# EAGLE board Triac-Board_MAX (EAGLE 7.2.0)
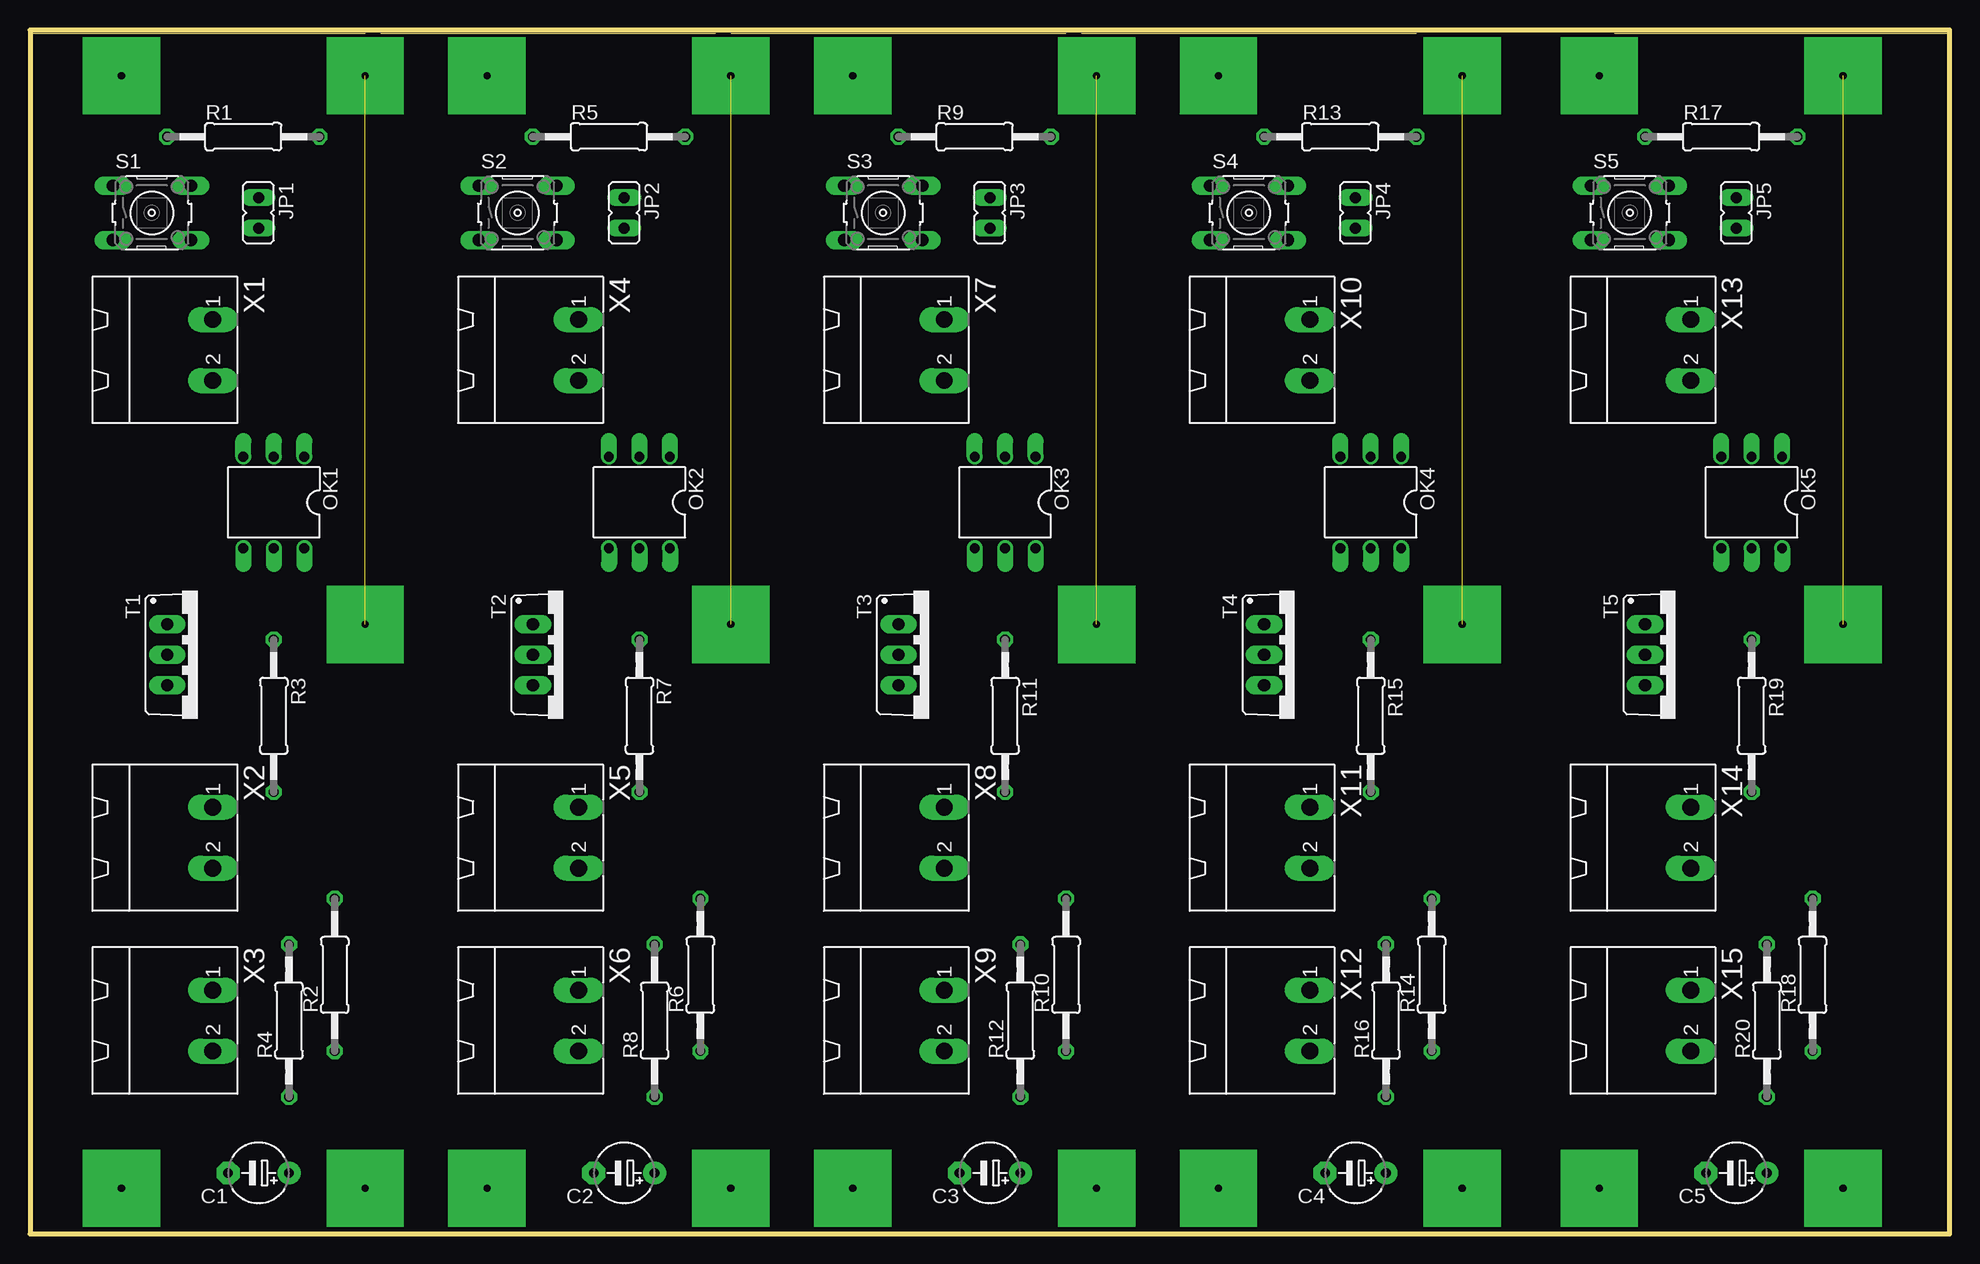
[diagram p0: board, top side]
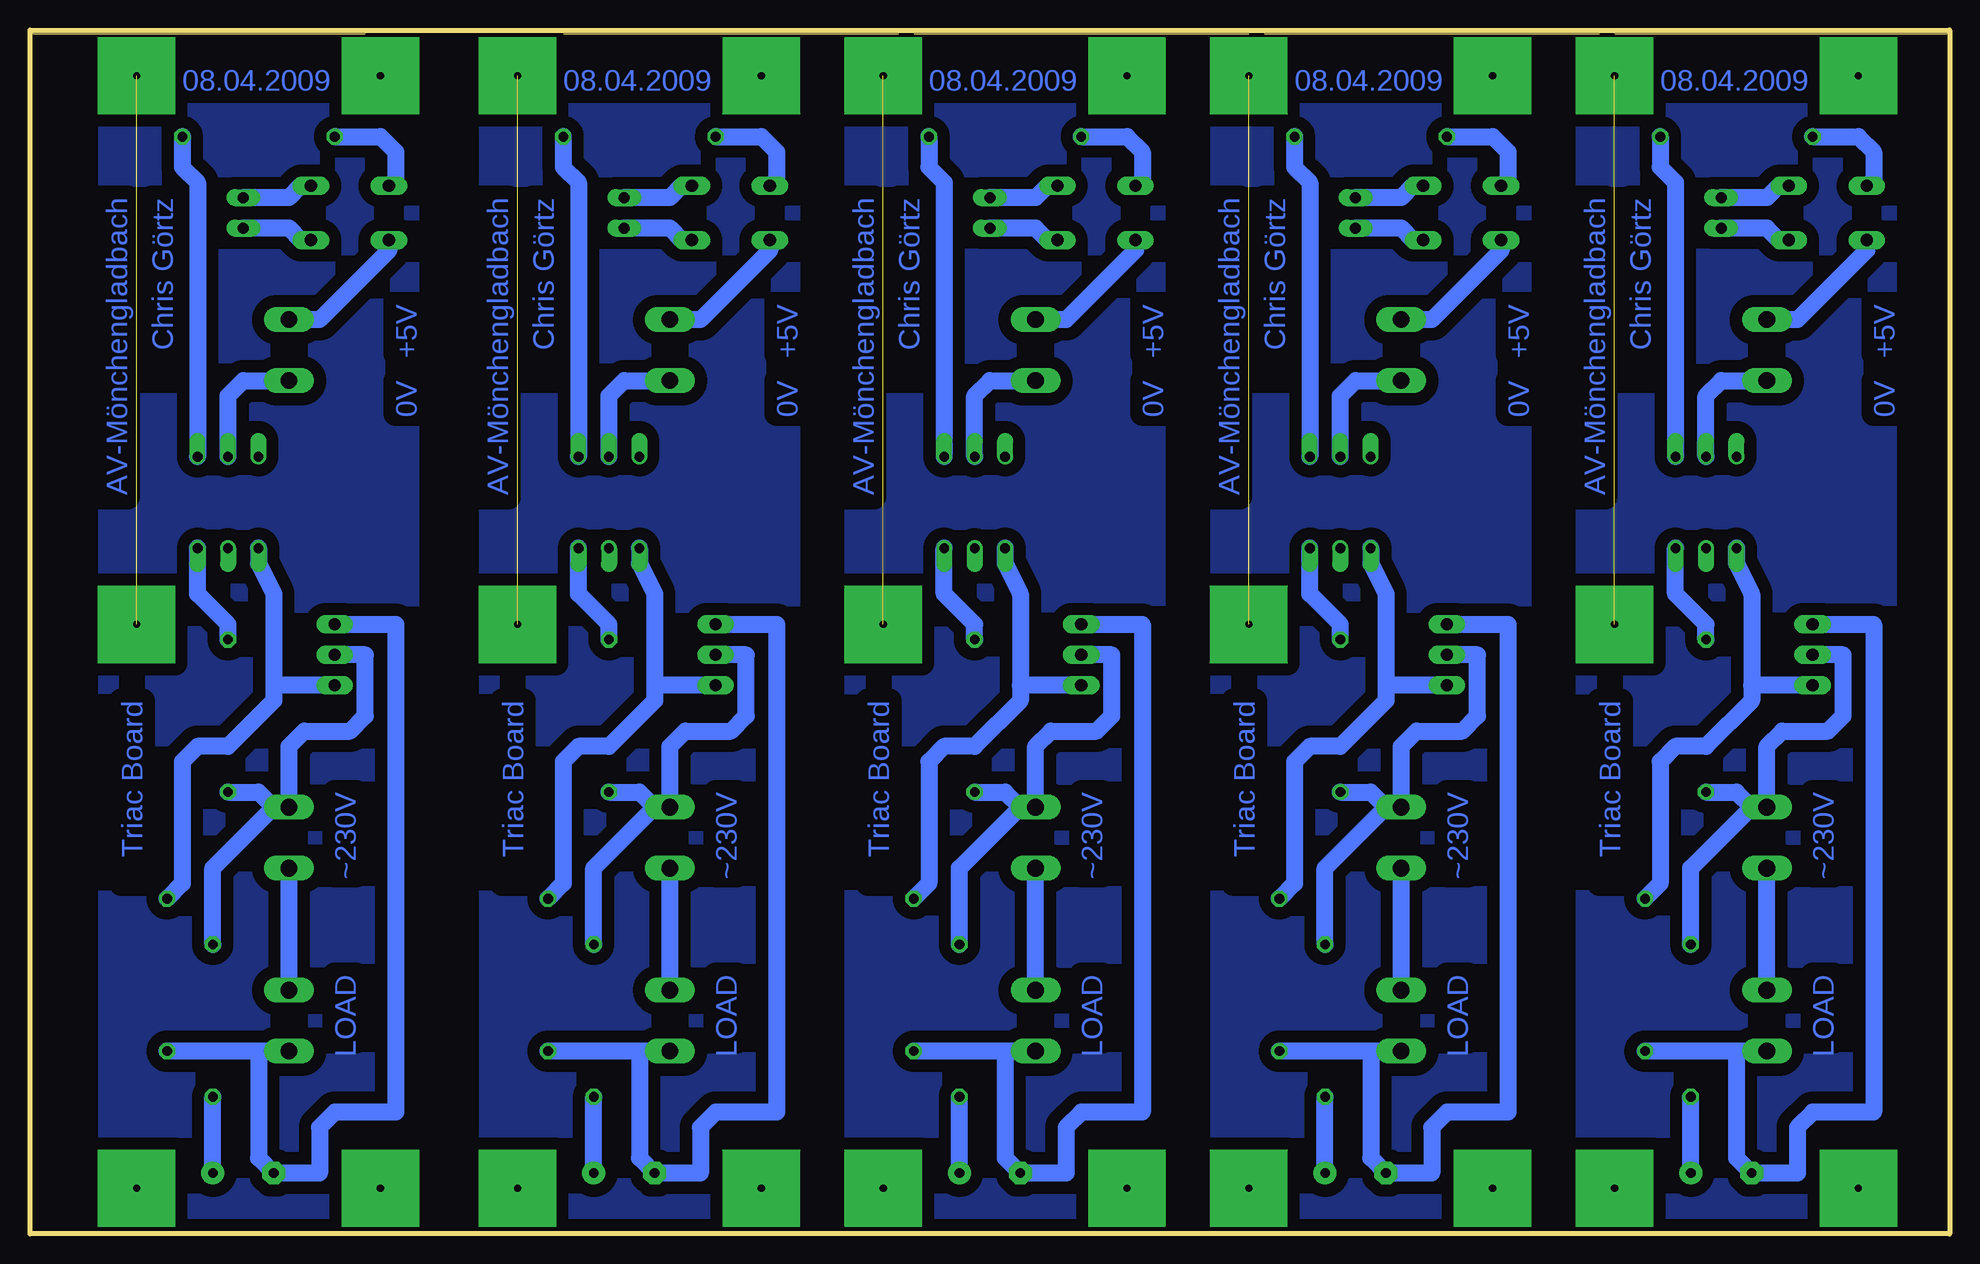
[diagram p1: board, bottom side, seen from below]

Size 160.02 x 100.33 mm. Coordinates in mm from the lower left corner, seen from the top.
Outline: 0,0 160.02,0 160.02,100.33 0,100.33 0,0
Outline: 0,0 27.92,0
Outline: 27.92,100 0,100 0,0
Outline: 29.21,0 57.13,0
Outline: 57.13,100 29.21,100
Outline: 69.85,0 97.77,0
Outline: 86.34,100 58.42,100
Outline: 99.06,0 115.55,0
Outline: 115.55,100 87.63,100
Outline: 132.08,0 160,0 160,100 132.08,100
Copper layers (1*16): Top 0.035mm / dielectric 1.5mm / Bottom 0.035mm
Design rules "default": minimum track width 10mil, minimum drill 24mil, track to track 8mil, track to pad 8mil, pad to pad 8mil, via to via 8mil, smd to smd 8mil, copper to edge 40mil, drill to drill 8mil, minimum pad ring 10mil, minimum via ring 8mil, stop-mask expansion 4mil, vias tented up to drill 0mil, thermal gap 10mil

## Footprints (pad centres in the part's own frame; a part is rotated, then mirrored left to right if it is on the bottom)
E5-5 = drill 0.813 pad 1.905: + -2.54,0 | drill 0.813 pad 1.905 octagon: - 2.54,0
JP1 = drill 0.914 long: 1 0,-1.27; 2 0,1.27
DIL06 = drill 0.813 offset: 1 -2.54,-3.81; 2 0,-3.81; 3 2.54,-3.81; 4 2.54,3.81; 5 0,3.81; 6 -2.54,3.81
0207/12 = drill 0.813 octagon: 1 -6.35,0; 2 6.35,0
B3F-10XX = drill 1.016 long: 1 -3.251,2.261; 2 3.251,2.261; 3 -3.251,-2.261; 4 3.251,-2.261
TO220BV = drill 1.016 long: G 2.54,-2.54; T1 -2.54,-2.54; T2 0,-2.54
MSTBA2 = drill 1.397 long: 1 -2.54,5.08; 2 2.54,5.08

## Placement (x,y rotation side)
C1  10nF/400v  [E5-5]  19.05,5.08 180 top
C2  10nF/400v  [E5-5]  49.53,5.08 180 top
C3  10nF/400v  [E5-5]  80.01,5.08 180 top
C4  10nF/400v  [E5-5]  110.49,5.08 180 top
C5  10nF/400v  [E5-5]  142.24,5.08 180 top
JP1  [JP1]  19.05,85.09 180 top
JP2  [JP1]  49.53,85.09 180 top
JP3  [JP1]  80.01,85.09 180 top
JP4  [JP1]  110.49,85.09 180 top
JP5  [JP1]  142.24,85.09 180 top
OK1  IL410  [DIL06]  20.32,60.96 180 top
OK2  IL410  [DIL06]  50.8,60.96 180 top
OK3  IL410  [DIL06]  81.28,60.96 180 top
OK4  IL410  [DIL06]  111.76,60.96 180 top
OK5  IL410  [DIL06]  143.51,60.96 180 top
R1  330  [0207/12]  17.78,91.44 0 top
R2  330  [0207/12]  25.4,21.59 90 top
R3  330  [0207/12]  20.32,43.18 270 top
R4  39  [0207/12]  21.59,17.78 90 top
R5  330  [0207/12]  48.26,91.44 0 top
R6  330  [0207/12]  55.88,21.59 90 top
R7  330  [0207/12]  50.8,43.18 270 top
R8  39  [0207/12]  52.07,17.78 90 top
R9  330  [0207/12]  78.74,91.44 0 top
R10  330  [0207/12]  86.36,21.59 90 top
R11  330  [0207/12]  81.28,43.18 270 top
R12  39  [0207/12]  82.55,17.78 90 top
R13  330  [0207/12]  109.22,91.44 0 top
R14  330  [0207/12]  116.84,21.59 90 top
R15  330  [0207/12]  111.76,43.18 270 top
R16  39  [0207/12]  113.03,17.78 90 top
R17  330  [0207/12]  140.97,91.44 0 top
R18  330  [0207/12]  148.59,21.59 90 top
R19  330  [0207/12]  143.51,43.18 270 top
R20  39  [0207/12]  144.78,17.78 90 top
S1  [B3F-10XX]  10.16,85.09 0 top
S2  [B3F-10XX]  40.64,85.09 0 top
S3  [B3F-10XX]  71.12,85.09 0 top
S4  [B3F-10XX]  101.6,85.09 0 top
S5  [B3F-10XX]  133.35,85.09 0 top
T1  BT138-V  [TO220BV]  13.97,48.26 270 top
T2  BT138-V  [TO220BV]  44.45,48.26 270 top
T3  BT138-V  [TO220BV]  74.93,48.26 270 top
T4  BT138-V  [TO220BV]  105.41,48.26 270 top
T5  BT138-V  [TO220BV]  137.16,48.26 270 top
X1  MSTBA2  [MSTBA2]  10.16,73.66 270 top
X2  MSTBA2  [MSTBA2]  10.16,33.02 270 top
X3  MSTBA2  [MSTBA2]  10.16,17.78 270 top
X4  MSTBA2  [MSTBA2]  40.64,73.66 270 top
X5  MSTBA2  [MSTBA2]  40.64,33.02 270 top
X6  MSTBA2  [MSTBA2]  40.64,17.78 270 top
X7  MSTBA2  [MSTBA2]  71.12,73.66 270 top
X8  MSTBA2  [MSTBA2]  71.12,33.02 270 top
X9  MSTBA2  [MSTBA2]  71.12,17.78 270 top
X10  MSTBA2  [MSTBA2]  101.6,73.66 270 top
X11  MSTBA2  [MSTBA2]  101.6,33.02 270 top
X12  MSTBA2  [MSTBA2]  101.6,17.78 270 top
X13  MSTBA2  [MSTBA2]  133.35,73.66 270 top
X14  MSTBA2  [MSTBA2]  133.35,33.02 270 top
X15  MSTBA2  [MSTBA2]  133.35,17.78 270 top

## Library data of the parts
C1-C5 R1-R20 = resistor
JP1-JP5 = jumper
OK1-OK5 = optocoupler; MF: VISHAY/TELEFUNKEN; MPN: IL410; OC_FARNELL: 1045434; OC_NEWARK: 58K1715
S1-S5 = switch-omron; MPN: B3F-1000; OC_FARNELL: 176432; OC_NEWARK: 36M3542
T1-T5 = triac
X1-X15 = con-phoenix-508; MF: FARNELL; MPN: 1757242; OC_FARNELL: 3705171; OC_NEWARK: 71C4161

## Nets
GND: OK1.2 X1.2
GND1: OK2.2 X4.2
GND2: OK3.2 X7.2
GND3: OK4.2 X10.2
GND4: OK5.2 X13.2
N$1: OK1.1 R1.2
N$2: R1.1 S1.1
N$4: OK1.6 R3.1
N$5: JP1.1 S1.2
N$6: JP1.2 S1.4
N$7: OK1.4 R2.2 T1.G
N$8: C1.+ R4.1
N$9: C1.- R2.1 T1.T1 X3.2
N$14: OK2.1 R5.2
N$15: R5.1 S2.1
N$16: JP2.1 S2.2
N$17: JP2.2 S2.4
N$18: OK2.6 R7.1
N$19: OK2.4 R6.2 T2.G
N$20: C2.+ R8.1
N$21: C2.- R6.1 T2.T1 X6.2
N$27: OK3.1 R9.2
N$28: R9.1 S3.1
N$29: JP3.1 S3.2
N$30: JP3.2 S3.4
N$31: OK3.6 R11.1
N$32: OK3.4 R10.2 T3.G
N$33: C3.+ R12.1
N$34: C3.- R10.1 T3.T1 X9.2
N$40: OK4.1 R13.2
N$41: R13.1 S4.1
N$42: JP4.1 S4.2
N$43: JP4.2 S4.4
N$44: OK4.6 R15.1
N$45: OK4.4 R14.2 T4.G
N$46: C4.+ R16.1
N$47: C4.- R14.1 T4.T1 X12.2
N$53: OK5.1 R17.2
N$54: R17.1 S5.1
N$55: JP5.1 S5.2
N$56: JP5.2 S5.4
N$57: OK5.6 R19.1
N$58: OK5.4 R18.2 T5.G
N$59: C5.+ R20.1
N$60: C5.- R18.1 T5.T1 X15.2
V+: R3.2 R4.2 T1.T2 X2.1
V+1: R7.2 R8.2 T2.T2 X5.1
V+2: R11.2 R12.2 T3.T2 X8.1
V+3: R15.2 R16.2 T4.T2 X11.1
V+4: R19.2 R20.2 T5.T2 X14.1
V-: X2.2 X3.1
V-1: X5.2 X6.1
V-2: X8.2 X9.1
V-3: X11.2 X12.1
V-4: X14.2 X15.1
VCC: S1.3 X1.1
VCC1: S2.3 X4.1
VCC2: S3.3 X7.1
VCC3: S4.3 X10.1
VCC4: S5.3 X13.1

## Tracks (layer width: path | path; a pad name or v marks a point on that pad's centre or on a via)
GND
  Bottom 1.422: OK1.2 20.32,69.85 19.05,71.12 X1.2
GND1
  Bottom 1.422: OK2.2 50.8,69.85 49.53,71.12 X4.2
GND2
  Bottom 1.422: OK3.2 81.28,69.85 80.01,71.12 X7.2
GND3
  Bottom 1.422: OK4.2 111.76,69.85 110.49,71.12 X10.2
GND4
  Bottom 1.422: OK5.2 143.51,69.85 142.24,71.12 X13.2
N$1
  Bottom 1.422: R1.2 24.13,88.9 22.86,87.63 OK1.1
N$2
  Bottom 1.422: R1.1 7.62,91.44 6.35,90.17 6.35,87.91 S1.1
N$3  (via drill 0.6 pad 6.45)
  other vias: 7.62,96.52
N$4
  Bottom 1.422: R3.1 20.32,50.8 22.86,53.34 OK1.6
N$5
  Bottom 1.422: S1.2 14.25,87.35 15.24,86.36 JP1.1
N$6
  Bottom 1.422: S1.4 14.25,82.83 15.24,83.82 JP1.2
N$7
  Bottom 1.422: T1.G 16.51,45.72 | OK1.4 17.78,55.88 16.51,53.34 16.51,45.72 | 16.51,45.72 16.51,44.45 20.32,40.64 22.86,40.64 24.13,39.37 24.13,29.21 R2.2
N$8
  Bottom 1.422: C1.+ R4.1
N$9
  Bottom 1.422: T1.T1 6.35,50.8 6.35,10.16 11.43,10.16 12.7,8.89 12.7,5.08 C1.- 17.78,6.35 17.78,15.24 | 17.78,15.24 R2.1 | X3.2 17.78,15.24
N$10  (via drill 0.6 pad 6.45)  (1 unrouted)
  other vias: 27.94,96.52 27.94,50.8
N$11  (via drill 0.6 pad 6.45)
  other vias: 7.62,3.81
N$12  (via drill 0.6 pad 6.45)
  other vias: 27.94,3.81
N$13
  pour Bottom (isolate 1.016): 5.08,99.06 30.48,99.06 30.48,1.27 5.08,1.27
N$14
  Bottom 1.422: R5.2 54.61,88.9 53.34,87.63 OK2.1
N$15
  Bottom 1.422: R5.1 38.1,91.44 36.83,90.17 36.83,87.91 S2.1
N$16
  Bottom 1.422: S2.2 44.73,87.35 45.72,86.36 JP2.1
N$17
  Bottom 1.422: S2.4 44.73,82.83 45.72,83.82 JP2.2
N$18
  Bottom 1.422: R7.1 50.8,50.8 53.34,53.34 OK2.6
N$19
  Bottom 1.422: T2.G 46.99,45.72 | OK2.4 48.26,55.88 46.99,53.34 46.99,45.72 | 46.99,45.72 46.99,44.45 50.8,40.64 53.34,40.64 54.61,39.37 54.61,29.21 R6.2
N$20
  Bottom 1.422: C2.+ R8.1
N$21
  Bottom 1.422: T2.T1 36.83,50.8 36.83,10.16 41.91,10.16 43.18,8.89 43.18,5.08 C2.- 48.26,6.35 48.26,15.24 | 48.26,15.24 R6.1 | X6.2 48.26,15.24
N$22  (via drill 0.6 pad 6.45)
  other vias: 38.1,96.52
N$23  (via drill 0.6 pad 6.45)  (1 unrouted)
  other vias: 58.42,96.52 58.42,50.8
N$24  (via drill 0.6 pad 6.45)
  other vias: 38.1,3.81
N$25  (via drill 0.6 pad 6.45)
  other vias: 58.42,3.81
N$26
  pour Bottom (isolate 1.016): 35.56,99.06 60.96,99.06 60.96,1.27 35.56,1.27
N$27
  Bottom 1.422: R9.2 85.09,88.9 83.82,87.63 OK3.1
N$28
  Bottom 1.422: R9.1 68.58,91.44 67.31,90.17 67.31,87.91 S3.1
N$29
  Bottom 1.422: S3.2 75.21,87.35 76.2,86.36 JP3.1
N$30
  Bottom 1.422: S3.4 75.21,82.83 76.2,83.82 JP3.2
N$31
  Bottom 1.422: R11.1 81.28,50.8 83.82,53.34 OK3.6
N$32
  Bottom 1.422: T3.G 77.47,45.72 | OK3.4 78.74,55.88 77.47,53.34 77.47,45.72 | 77.47,45.72 77.47,44.45 81.28,40.64 83.82,40.64 85.09,39.37 85.09,29.21 R10.2
N$33
  Bottom 1.422: C3.+ R12.1
N$34
  Bottom 1.422: T3.T1 67.31,50.8 67.31,10.16 72.39,10.16 73.66,8.89 73.66,5.08 C3.- 78.74,6.35 78.74,15.24 | 78.74,15.24 R10.1 | X9.2 78.74,15.24
N$35  (via drill 0.6 pad 6.45)
  other vias: 68.58,96.52
N$36  (via drill 0.6 pad 6.45)  (1 unrouted)
  other vias: 88.9,96.52 88.9,50.8
N$37  (via drill 0.6 pad 6.45)
  other vias: 68.58,3.81
N$38  (via drill 0.6 pad 6.45)
  other vias: 88.9,3.81
N$39
  pour Bottom (isolate 1.016): 66.04,99.06 91.44,99.06 91.44,1.27 66.04,1.27
N$40
  Bottom 1.422: R13.2 115.57,88.9 114.3,87.63 OK4.1
N$41
  Bottom 1.422: R13.1 99.06,91.44 97.79,90.17 97.79,87.91 S4.1
N$42
  Bottom 1.422: S4.2 105.69,87.35 106.68,86.36 JP4.1
N$43
  Bottom 1.422: S4.4 105.69,82.83 106.68,83.82 JP4.2
N$44
  Bottom 1.422: R15.1 111.76,50.8 114.3,53.34 OK4.6
N$45
  Bottom 1.422: T4.G 107.95,45.72 | OK4.4 109.22,55.88 107.95,53.34 107.95,45.72 | 107.95,45.72 107.95,44.45 111.76,40.64 114.3,40.64 115.57,39.37 115.57,29.21 R14.2
N$46
  Bottom 1.422: C4.+ R16.1
N$47
  Bottom 1.422: T4.T1 97.79,50.8 97.79,10.16 102.87,10.16 104.14,8.89 104.14,5.08 C4.- 109.22,6.35 109.22,15.24 | 109.22,15.24 R14.1 | X12.2 109.22,15.24
N$48  (via drill 0.6 pad 6.45)
  other vias: 99.06,96.52
N$49  (via drill 0.6 pad 6.45)  (1 unrouted)
  other vias: 119.38,96.52 119.38,50.8
N$50  (via drill 0.6 pad 6.45)
  other vias: 99.06,3.81
N$51  (via drill 0.6 pad 6.45)
  other vias: 119.38,3.81
N$52
  pour Bottom (isolate 1.016): 96.52,99.06 121.92,99.06 121.92,1.27 96.52,1.27
N$53
  Bottom 1.422: R17.2 147.32,88.9 146.05,87.63 OK5.1
N$54
  Bottom 1.422: R17.1 130.81,91.44 129.54,90.17 129.54,87.91 S5.1
N$55
  Bottom 1.422: S5.2 137.44,87.35 138.43,86.36 JP5.1
N$56
  Bottom 1.422: S5.4 137.44,82.83 138.43,83.82 JP5.2
N$57
  Bottom 1.422: R19.1 143.51,50.8 146.05,53.34 OK5.6
N$58
  Bottom 1.422: T5.G 139.7,45.72 | OK5.4 140.97,55.88 139.7,53.34 139.7,45.72 | 139.7,45.72 139.7,44.45 143.51,40.64 146.05,40.64 147.32,39.37 147.32,29.21 R18.2
N$59
  Bottom 1.422: C5.+ R20.1
N$60
  Bottom 1.422: T5.T1 129.54,50.8 129.54,10.16 134.62,10.16 135.89,8.89 135.89,5.08 C5.- 140.97,6.35 140.97,15.24 | 140.97,15.24 R18.1 | X15.2 140.97,15.24
N$61  (via drill 0.6 pad 6.45)
  other vias: 130.81,96.52
N$62  (via drill 0.6 pad 6.45)  (1 unrouted)
  other vias: 151.13,96.52 151.13,50.8
N$63  (via drill 0.6 pad 6.45)
  other vias: 130.81,3.81
N$64  (via drill 0.6 pad 6.45)
  other vias: 151.13,3.81
N$65
  pour Bottom (isolate 1.016): 128.27,99.06 153.67,99.06 153.67,1.27 128.27,1.27
V+
  Bottom 1.422: T1.T2 8.89,48.26 8.89,43.18 10.16,41.91 13.97,41.91 15.24,40.64 X2.1 16.51,35.56 | R4.2 21.59,30.48 16.51,35.56 | R3.2 17.78,36.83 16.51,35.56
V+1
  Bottom 1.422: T2.T2 39.37,48.26 39.37,43.18 40.64,41.91 44.45,41.91 45.72,40.64 X5.1 46.99,35.56 | R8.2 52.07,30.48 46.99,35.56 | R7.2 48.26,36.83 46.99,35.56
V+2
  Bottom 1.422: T3.T2 69.85,48.26 69.85,43.18 71.12,41.91 74.93,41.91 76.2,40.64 X8.1 77.47,35.56 | R12.2 82.55,30.48 77.47,35.56 | R11.2 78.74,36.83 77.47,35.56
V+3
  Bottom 1.422: T4.T2 100.33,48.26 100.33,43.18 101.6,41.91 105.41,41.91 106.68,40.64 X11.1 107.95,35.56 | R16.2 113.03,30.48 107.95,35.56 | R15.2 109.22,36.83 107.95,35.56
V+4
  Bottom 1.422: T5.T2 132.08,48.26 132.08,43.18 133.35,41.91 137.16,41.91 138.43,40.64 X14.1 139.7,35.56 | R20.2 144.78,30.48 139.7,35.56 | R19.2 140.97,36.83 139.7,35.56
V-
  Bottom 1.422: X3.1 X2.2
V-1
  Bottom 1.422: X6.1 X5.2
V-2
  Bottom 1.422: X9.1 X8.2
V-3
  Bottom 1.422: X12.1 X11.2
V-4
  Bottom 1.422: X15.1 X14.2
VCC
  Bottom 1.422: S1.3 6.91,81.99 12.7,76.2 X1.1
VCC1
  Bottom 1.422: S2.3 37.39,81.99 43.18,76.2 X4.1
VCC2
  Bottom 1.422: S3.3 67.87,81.99 73.66,76.2 X7.1
VCC3
  Bottom 1.422: S4.3 98.35,81.99 104.14,76.2 X10.1
VCC4
  Bottom 1.422: S5.3 130.1,81.99 135.89,76.2 X13.1

## Text on the board
Bottom: 08.04.2009 | 08.04.2009 | 08.04.2009 | 08.04.2009 | 08.04.2009 | Chris Görtz | AV-Mönchengladbach | Chris Görtz | AV-Mönchengladbach | Chris Görtz | AV-Mönchengladbach | Chris Görtz | AV-Mönchengladbach | Chris Görtz | AV-Mönchengladbach | +5V | +5V | +5V | +5V | +5V | 0V | 0V | 0V | 0V | 0V | Triac Board | Triac Board | Triac Board | Triac Board | Triac Board | ~230V | ~230V | ~230V | ~230V | ~230V | LOAD | LOAD | LOAD | LOAD | LOAD